# Altium PCB PCB_BTL.PcbDoc
Units mil, origin at the board's own origin, x right, y up, seen from the top; angles counter-clockwise.
Board outline 6000 x 4000 mil, 2 copper layers (Top Layer, Bottom Layer); 34 components, 25 nets, 123 pads, 0 vias.
Unrouted connection lines stored in the file: 63.
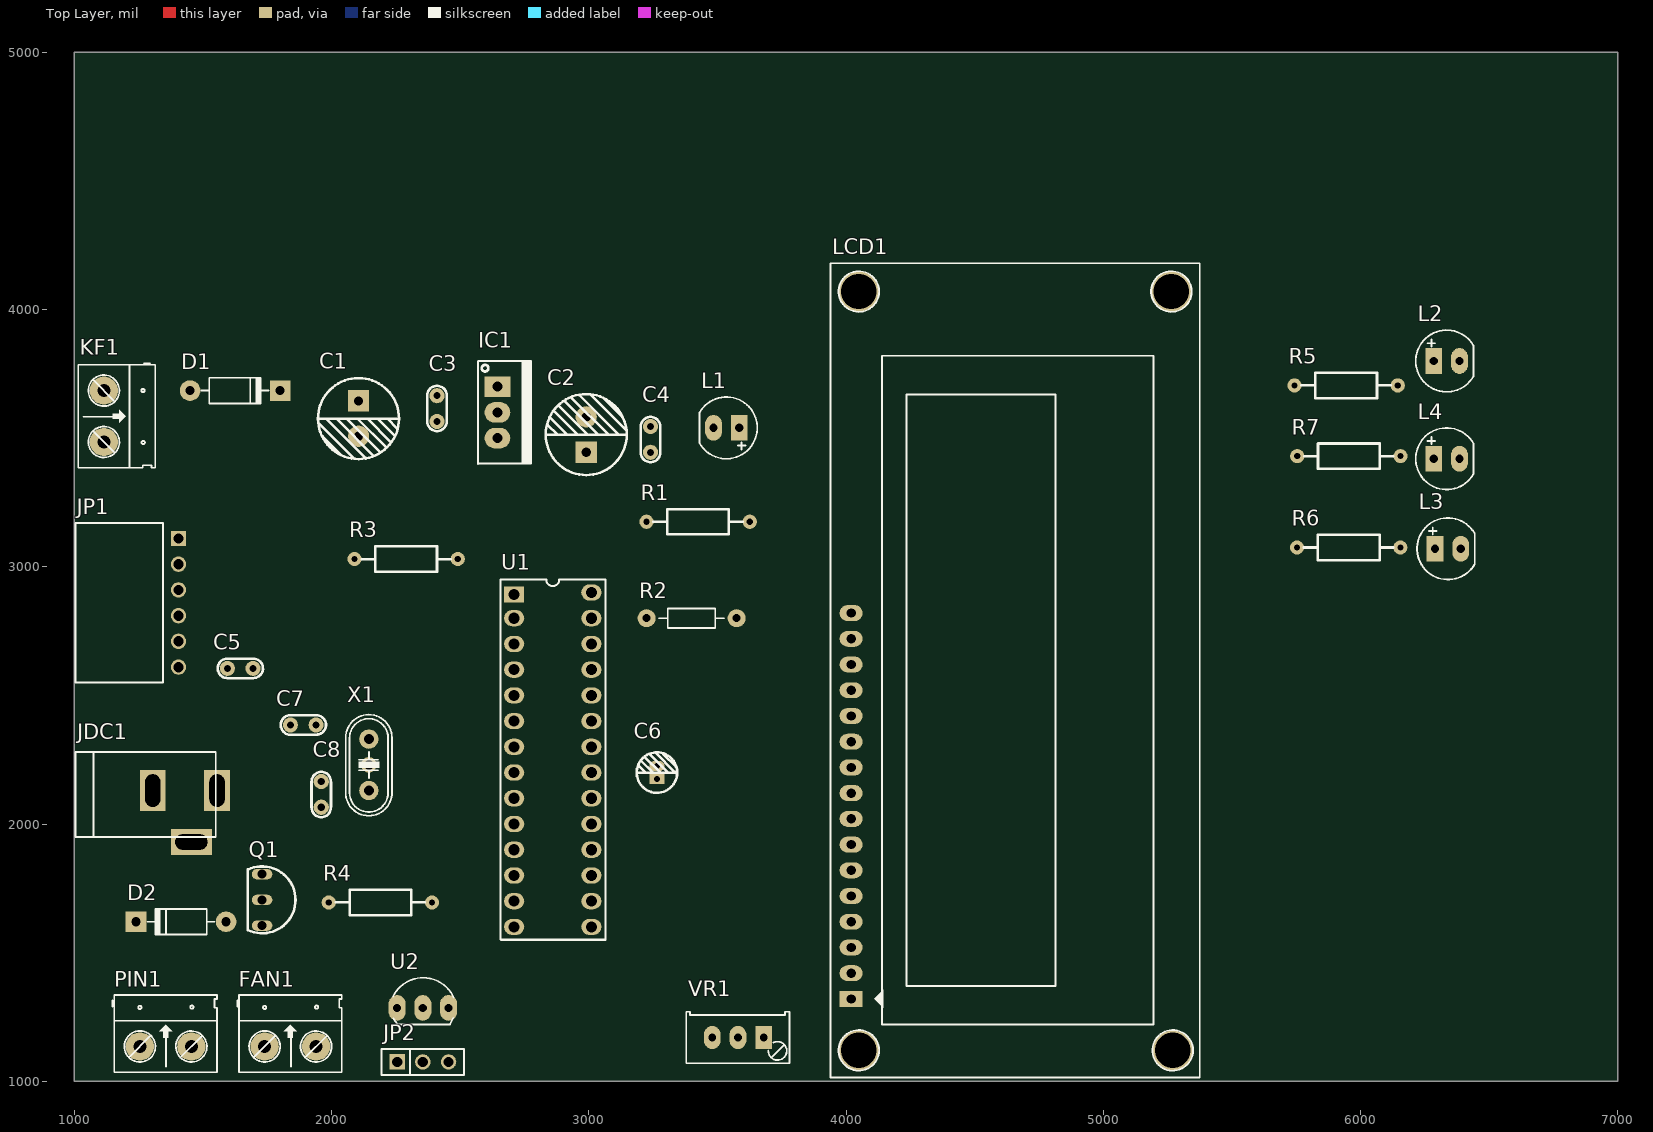
[diagram p0: Top Layer view]
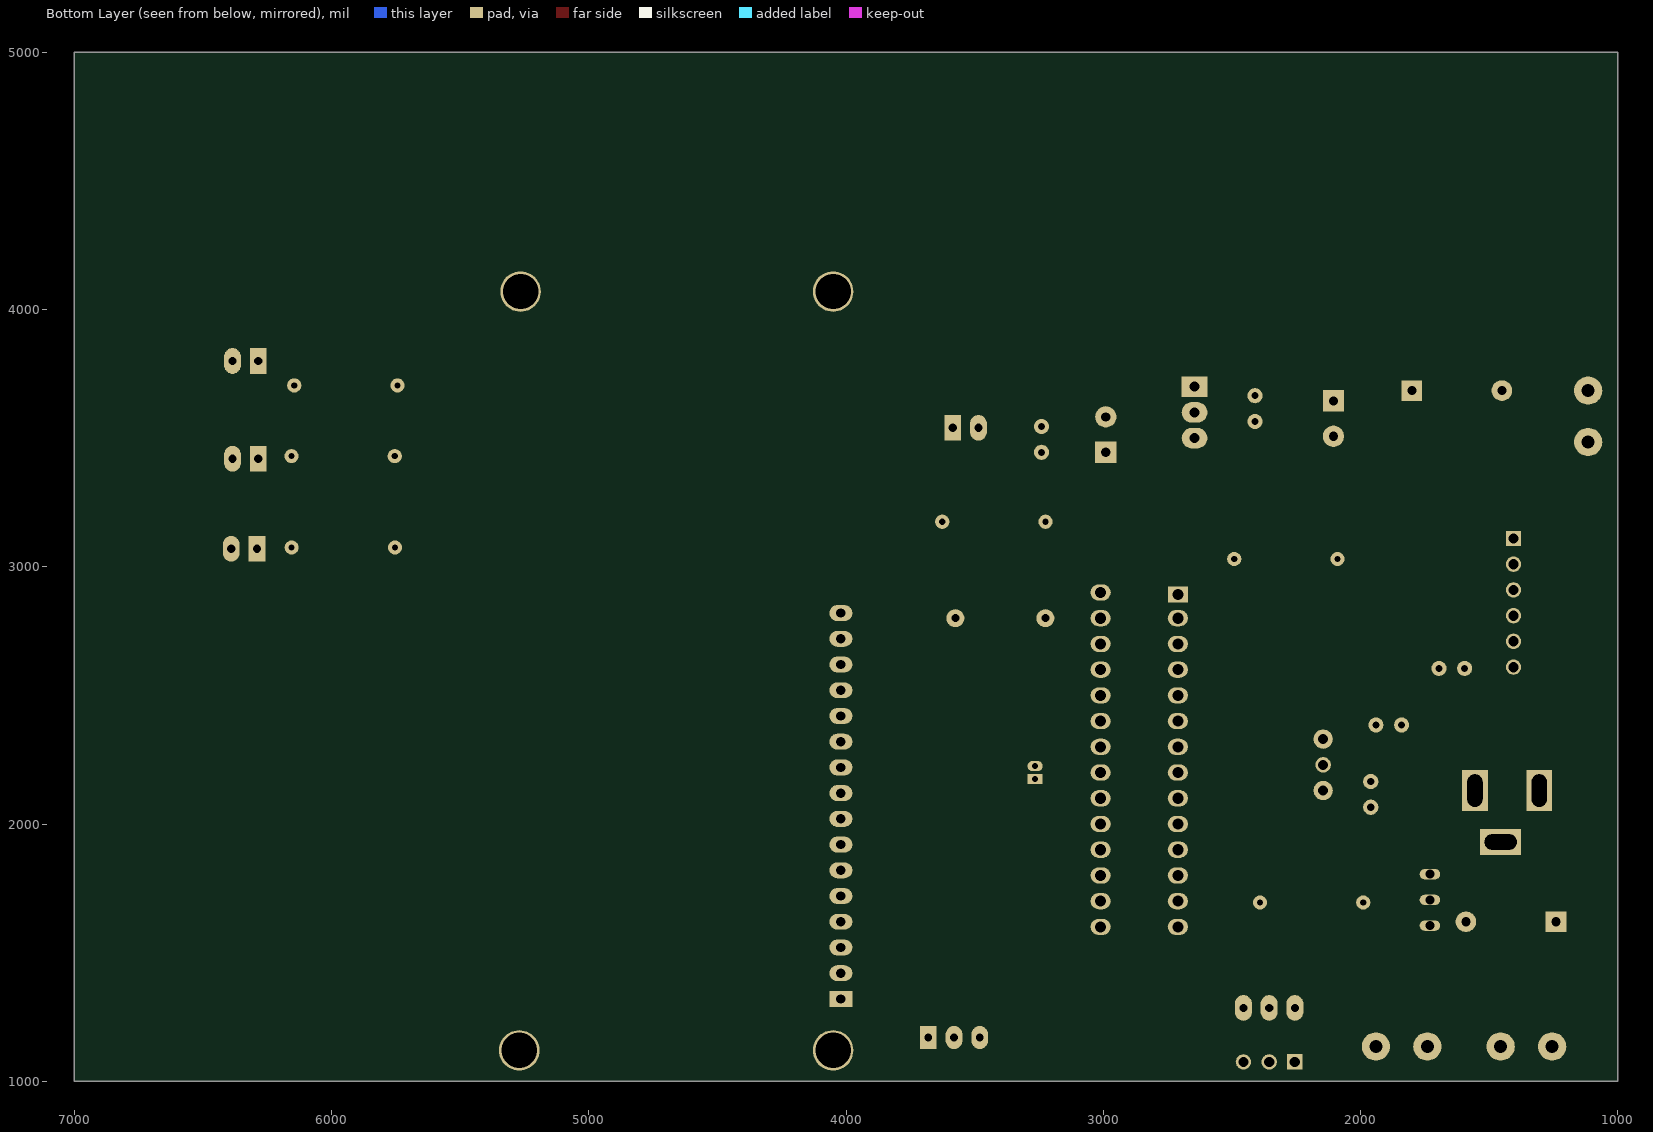
[diagram p1: Bottom Layer view, seen from below]

## Layer stack, top to bottom
Top Solder: solder mask 0.4, Solder Resist, Dk 3.5
Top Layer: signal copper 1.4
Dielectric 1: dielectric 12.6, FR-4, Dk 4.8
Bottom Layer: signal copper 1.4
Bottom Solder: solder mask 0.4, Solder Resist, Dk 3.5

## Board outline
1000,1000 7000,1000 7000,5000 1000,5000

## Design rules (kind name [scope] priority, off if disabled: settings)
Clearance [All] p1: gap=10 ignorepadtopadclearanceinfootprint=FALSE
PolygonConnect [All] p1: connectstyle=Relief reliefconductorwidth=10 reliefentries=4 polygonreliefangle="90 Angle" airgapwidth=10
RoutingVias [All] p1: holewidth=28 width=50 viastyle="Through Hole" minholewidth=28 minwidth=50 maxholewidth=28 maxwidth=50
SolderMaskExpansion [All] p1: expansion=4 istentingtop=FALSE
SupplyNets "Schematic Supply Nets_1" [InNet('\')] p1: voltage=0.000
Width [All] p1: maxlimit=10 minlimit=10 preferedwidth=10
30 further rules are at their usual default settings.

## Components (designator, comment, footprint, x,y, rotation, side; value= is the part's Value field where it differs from the comment)
C1 "1000uF" "tu hoa 8mm" 2105,3576.1 r270 top
C2 "1000uF" "tu hoa 8mm" 2990,3513.9 r90 top
C3 "104" "tu gom" 2410,3615 r270 top
C4 "104" "tu gom" 3240,3495 r90 top
C5 "104" "tu gom" 1645,2605 r180 top
C6 "10uF" "tu hoa 4mm" 3265,2200 r90 top
C7 "22pF" "tu gom" 1890,2385 r180 top
C8 "22pF" "tu gom" 1960,2115 r90 top
D1 "1N4007" D1A 1450,3685 r180 top
D2 "1N4007" D1A 1590,1620 r0 top
FAN1 "DC MOTOR" "Con 2 KF301 5.08" 1740,1135 r0 top
IC1 "LM7805" QTO-220 2645,3700 r270 top
JDC1 "Jac DC" DC-IN 1430,2030 r0 top
JP1 "JP 1x6 2.54" "JP 1x6 CC" 1405,2860 r270 top
JP2 "JP Sensor" "JP 1x3 CT" 2255,1075 r0 top
KF1 "CON 2 KF301" "Con 2 KF301 5.08" 1115,3685 r270 top
L1 "LED 5mm" LED-5MM-RED 3585,3540 r180 top
L2 "LED 5mm" LED-5MM-RED 6285,3800 r0 top
L3 "LED 5mm" LED-5MM-RED 6290,3070 r0 top
L4 "LED 5mm" LED-5MM-RED 6285,3420 r0 top
LCD1 "LCD16x2A" LCD16X2 4020,1320 r90 top
PIN1 "9V DC" "Con 2 KF301 5.08" 1255,1135 r0 top
Q1 "?" TO92 1730,1705 r180 top value=C9014
R1 "1k" "tro vach 1/4w" 3425,3175 r180 top
R2 "1k" R1/4W 3575,2800 r180 top value="R1/4W - 1K"
R3 "10k" "tro vach 1/4w" 2290,3030 r0 top
R4 "1k" "tro vach 1/4w" 2190,1695 r180 top
R5 "1k" "tro vach 1/4w" 5944.21,3705 r180 top
R6 "1k" "tro vach 1/4w" 5954.21,3075 r180 top
R7 "1k" "tro vach 1/4w" 5955,3430 r180 top
U1 "ATMEGA328P-PU" 27_DIP_7.62mm 2709.61,2892.52 r0 top
U2 "LM35" QTO-92 2355,1285 r0 top
VR1 "10K" VR1 3680,1170 r180 top value="VR 10K"
X1 "16Mhz" XT2 2145,2230 r90 top value=4Mhz

## Footprints (in the part's own frame and the unit in brackets; to place one, negate y for a bottom-side part, rotate by r counter-clockwise, add the part's x,y. Pads: shape width x height; smd on the part's side, far side on the other; paste and mask are expansions set on the pad)
27_DIP_7.62mm [mm]
  rect 2x1.6 hole 1.1: 1(0,0)
  oval 2x1.6 hole 1.1: 2(0.01,-2.35) 3(0.01,-4.89) 4(0.01,-7.43) 5(0.01,-9.97) 6(0.01,-12.51) 7(0.01,-15.05) 8(0.01,-17.59) 9(0.01,-20.13) 10(0.01,-22.67) 11(0.01,-25.21) 12(0.01,-27.75) 13(0.01,-30.29) 14(0.01,-32.83) 15(7.63,-32.83) 16(7.63,-30.29) 17(7.63,-27.75) 18(7.63,-25.21) 19(7.63,-22.67) 20(7.63,-20.13) 21(7.63,-17.59) 22(7.63,-15.05) 23(7.63,-12.51) 24(7.63,-9.97) 25(7.63,-7.43) 26(7.63,-4.89) 27(7.63,-2.35) 28(7.63,0.19)
  silkscreen extent -1.35,-34.1 9.02,1.46, body extent -0.23,-34.26 7.65,1.68, height 4.65
"Con 2 KF301 5.08" [mil]
  round 110 hole 50: 1(0,0) 2(200,0)
  silkscreen extent -106,-100 300,200, body extent -45,-97 255,190, height 335
D1A [mil] "Diode 1A, W 100mil, L 350mil"
  round 80 hole 35: 1(0,0)
  rect 80x80 hole 35: 2(-350,0)
  silkscreen extent -305,-50 -45,50, body extent -386,-33 34,36, height 84
DC-IN [mil] "Jac DC input"
  rect 100x160 hole 59.06 slot 125.98 at 90 deg: 1(125,100) 2(-125,100)
  rect 160x100 hole 59.06 slot 125.98 at 0 deg: 3(25,-100)
  silkscreen extent -425,-80 120,250, body extent -410,-105 134,269, height 434
"JP 1x3 CT" [mm]
  rect 1.52x1.52 hole 1.02: 1(0,0)
  round 1.52 hole 1.02: 2(2.54,0) 3(5.08,0)
  silkscreen extent -1.52,-1.27 6.6,1.27, body extent -1.52,-1.25 6.6,1.25, height 8.51
"JP 1x6 CC" [mm] "06p 1 row Right angle"
  rect 1.52x1.52 hole 1.02: 1(-6.35,0)
  round 1.52 hole 1.02: 2(-3.81,0) 3(-1.27,0) 4(1.27,0) 5(3.81,0) 6(6.35,0)
  silkscreen extent -7.87,-10.17 7.87,-1.52, body extent -7.87,-10.09 7.87,0.21, height 2.51
LCD16X2 [mil] "LCD dipslay 16x2, 16 pin"
  rect 62x90 hole 36: 1(0,0)
  oval 62x90 hole 36: 2(100,0) 3(200,0) 4(300,0) 5(400,0) 6(500,0) 7(600,0) 8(700,0) 9(800,0) 10(900,0) 11(1000,0) 12(1100,0) 13(1200,0) 14(1300,0) 15(1400,0) 16(1500,0)
  round 157.48 hole 137.8: "Hole 0"(-200,-30) "Hole 0"(-200,-1250) "Hole 0"(2750,-1245) "Hole 0"(2750,-30)
  silkscreen extent -305,-1355 2860,80, body extent -309,-1355 2860,82, height 414
LED-5MM-RED [mil] "LED 2 PIN, 5 ly , Only colour,pin to pin 100mil"
  rect 65x100 hole 32: 1(0,0)
  oval 65x100 hole 32: 2(100,0)
  silkscreen extent -70,-120 154,120, body extent -65,-119 149,118, height 339
QTO-92 [mil] "TO-92"
  oval 66x100 hole 32: 1(-100,0) 2(0,0) 3(100,0)
  silkscreen extent -117,-65 120,118, body extent -109,-66 109,95, height 245
QTO-220 [mil] "TO-220 - 1-2-3"
  rect 80x100 hole 39: 1(0,0)
  oval 80x100 hole 39: 2(100,0) 3(200,0)
  silkscreen extent -100,-76 300,130, body extent -121,-85 321,100, height 755
R1/4W [mil] "R 1/4W, 2 Pin, 350mil"
  round 70 hole 31: 1(0,0) 2(350,0)
  silkscreen extent 48,-38 302,38, body extent -40,-47 386,47, height 111
TO92 [mil] "TO, Flat Index; 3 In-Line, Axial Leads; Body Dia. 4.8mm"
  oval 80x40 hole 35.43: 1(0,-100) 2(0,0) 3(0,100)
  silkscreen extent -130,-130 55,130, body extent -100,-109 61,109, height 343
"tro vach 1/4w" [mm]
  round 1.4 hole 0.6: 1(-5.1,0) 2(5.1,0)
  silkscreen extent -4.39,-1.25 4.42,1.25, body extent -5.38,-1.2 5.38,1.2, height 2.41
"tu gom" [mm] "Tu gom mini"
  round 1.5 hole 0.7: 1(-1.27,0) 2(1.27,0)
  silkscreen extent -2.25,-0.97 2.22,0.97, body extent -2.92,-0.85 2.92,0.85, height 6.12
"tu hoa 4mm" [mm]
  rect 1x1.5 hole 0.6: 1(-0.635,0)
  oval 1x1.5 hole 0.6: 2(0.635,0)
  silkscreen extent -2,-2 2.01,2.01, body extent -2.47,-2.47 2.58,2.58, height 14.81
"tu hoa 8mm" [mm]
  rect 2.1x2.1 hole 0.9: 1(-1.75,0)
  round 2.1 hole 0.9: 2(1.75,0)
  silkscreen extent -4,-4 4,4, body extent -4.1,-4.07 4.1,4.13, height 13.81
VR1 [mil] "Variable Resistor"
  rect 65x90 hole 30: 1(0,0)
  oval 65x90 hole 30: 2(100,0) 3(200,0)
  silkscreen extent -100,-100 301,100, body extent -88,-130 288,110, height 455
XT2 [mm] "Footpin for Crystal 2 pin"
  round 1.524 hole 1: 0(0,0)
  round 1.905 hole 1: 1(-2.54,0) 2(2.54,0)
  silkscreen extent -5.03,-2.29 4.96,2.29, body extent -5.93,-2.36 5.42,2.29, height 3.5

## Part data
C1 C2: library part "Tu Hoa 1000uF 16V 8x20", "Cắm", Chung_Loai=Cắm, Don_Vi=Con, Ma_Hang=MH008300, So_Chan=2, Ten_Linh_Kien="Tụ Hóa 1000uF 16V 8x20MM"
C3 C4 C5: library part "Tu gom 104 50V", "Cắm", Chung_Loai=Cắm, Don_Vi=Con, Ma_Hang=MH004761, So_Chan=2, Ten_Linh_Kien="Tụ gốm 104 100nF 50V"
C6: library part "Tu Hoa 10uF 16V 4x7", "Cắm", Chung_Loai=Cắm, Don_Vi=Con, Ma_Hang=MH006855, So_Chan=2, Ten_Linh_Kien="Tụ Hóa 10uF 16V"
C7 C8: library part "Tu gom 22pF 50V", "Cắm", Chung_Loai=Cắm, Don_Vi=Con, Ma_Hang=MH004771, So_Chan=2, Ten_Linh_Kien="Tụ gốm 22P 50V"
D1 D2: library part D1A, "Diode 1A"
FAN1 PIN1: library part "CON 2 KF301", "Cắm", Chung_Loai=Cắm, Don_Vi=Con, Ma_Hang=MH000987, Ten_Linh_Kien="CON 2 KF301-2P 5.08MM Xanh Dương"
IC1: library part LM78xx, "On ap +, from + 5 to + 24VDC"
JDC1: library part DCIN, "Jac DC input"
JP1: library part "JP 1x6 2.54 Cai Cong", "Cắm", Chung_Loai=Cắm, Don_Vi=Con, Ma_Hang=MH001265, Ten_Linh_Kien="Jump Đơn Cái 2.54MM 1x40P Cong"
JP2: library part "JP 1x3 2.54 Cai Thang", "Cắm", Chung_Loai=Cắm, Don_Vi=Con, Ma_Hang=MH004006, Ten_Linh_Kien="Jump Đơn Cái 2.54MM 1x20P Thẳng"
KF1: "Cắm", Chung_Loai=Cắm, Don_Vi=Con, Ma_Hang=MH000987, Ten_Linh_Kien="CON 2 KF301-2P 5.08MM Xanh Dương"
L1 L2 L3 L4: library part "LED 5mm Do", "Cắm", Chung_Loai=Cắm, Don_Vi=Con, Ma_Hang=MH008967, Ten_Linh_Kien="Led 5MM Phủ Đỏ (1000c)"
LCD1: library part LCD16x2, "LCD dipslay 16 char, 2 line"
Q1: library part "Trans 2N3904", "NPN transistor EBC"
R1 R4 R5 R6 R7: library part "Tro Vach 1/4W 5% 1k", "Cắm", Chung_Loai=Cắm, Don_Vi=Con, Ma_Hang=MH007390, So_Chan=2, Ten_Linh_Kien="Trở Vạch 1/4w 5% 1k"
R2: library part Res, "Resistor 1/4W"
R3: library part "Tro Vach 1/4W 5% 10k", "Căm", Chung_Loai=Cắm, Don_Vi=Con, Ma_Hang=MH007354, So_Chan=2, Ten_Linh_Kien="Trở Vạch 1/4w 5% 10K"
U1: "ATMEGA328P-PU; 8 bit Microcontroller AVR 20MHz 1; 32kb Flash; 2kb RAM; I2C SPI 2", Case/Package=PDIP, Frequency=20MHz, Manufacturer="Microchip / Atmel", Max Operating Temperature=85°C, Max Supply Voltage=5.5V, Min Operating Temperature=-40°C, Min Supply Voltage=1.8V, Package Quantity=14, Supplier Part Number 1=ATMEGA328P-PU-ND, Category=Microcontrollers, ComponentLink1Description=https://datasheet.ciiva.com/20168/73-4283-20168380.pdf?src-supplier=Rapid+Electronics, ComponentLink1URL=https://datasheet.ciiva.com/20168/73-4283-20168380.pdf?src-supplier=Rapid+Electronics, ComponentLink2Description=https://datasheet.ciiva.com/19457/2139111-19457070.pdf?src-supplier=Jameco, ComponentLink2URL=https://datasheet.ciiva.com/19457/2139111-19457070.pdf?src-supplier=Jameco, ComponentLink3Description=https://datasheet.ciiva.com/1157/1684409-1157696.pdf?src-supplier=Element14, ComponentLink3URL=https://datasheet.ciiva.com/1157/1684409-1157696.pdf?src-supplier=Element14, ComponentLink4Description=https://datasheet.ciiva.com/26818/atmega328p-pu-26818578.pdf?src-supplier=IIIC, ComponentLink4URL=https://datasheet.ciiva.com/26818/atmega328p-pu-26818578.pdf?src-supplier=IIIC, ComponentLink5Description=https://datasheet.ciiva.com/29119/155197-da-01-en-microcontr-atmega328p-pu-8bit-pdip-28-29119593.pdf?src-supplier=Conrad, ComponentLink5URL=https://datasheet.ciiva.com/29119/155197-da-01-en-microcontr-atmega328p-pu-8bit-pdip-28-29119593.pdf?src-supplier=Conrad, ComponentLink6Description=https://datasheet.ciiva.com/15213/getdatasheetpartid-318533-15213133.pdf?src-supplier=Verical, ComponentLink6URL=https://datasheet.ciiva.com/15213/getdatasheetpartid-318533-15213133.pdf?src-supplier=Verical, Contact Plating=Tin,Matte, Core Architecture=AVR, Data Bus Width=8b, Height=3.28mm, Interface=I2C,SPI,UART,USART,2-Wire, Lead Free="Lead Free", Length=37.4mm, Manufacturer Part Number=ATMEGA328P-PU, Max Frequency=20MHz, Memory Size=32KB, Memory Type=FLASH, Mount="Through Hole", Number of ADC Channels=6, Number of I2C Channels=1, Number of I/Os=23, Number of Pins=28, Number of Programmable I/O=23, Number of PWM Channels=6, Number of SPI Channels=1, Number of Timers/Counters=3, Oscillator Type=Internal, Packaging=Rail/Tube, Peripherals="Brown-out Detect/Reset,POR,PWM,WDT", Pricing 1="1=2,08000, 25=1,91000, 100=1,73000 (USD)", Radiation Hardening=No, RAM Size=2KB, REACH SVHC="No SVHC", RoHS=Yes, Stock 1=5280, Supplier 1=Digi-Key, Watchdog Timer=Yes, Width=6.76mm
U2: "Teminal"
VR1: library part VR1, "Var Resistor"
X1: library part XT2, "Crystal For all Crystal 2pin."

## Nets (pads, with @x,y where several pads share a name; then routed paths per layer and width w, separated by ;. In a path a pad name is that pad's centre, name@x,y a point inside that pad or via, vN(x,y) a via of type N, cw(c..) or ccw(c..) an arc to the next point about the centre after c; other vN are vias at no path point)
9: C7.1 U1.9 X1.2
9V: D2.2 FAN1.2 PIN1.1
10: C8.1 U1.10 X1.1
20: C2.1 C4.1 C6.1 IC1.3 JP1.3 JP2.1 LCD1.2 R1.2 R2.2 R3.1 U1.7 U1.20 U2.1 VR1.1
\: C1.2 C2.2 C3.2 C4.2 C6.2 C7.2 C8.2 IC1.2 JDC1.2 JP1.1 JP2.3 KF1.2 L1.2 L2.2 L3.2 L4.2 LCD1.1 LCD1.5 LCD1.16 PIN1.2 Q1.1 U1.8 U1.22 U2.3 VR1.3
A0: JP2.2 U2.2
CTS: JP1.2
DTR: C5.1 JP1.6
fan: R4.1
NetC1_1: C1.1 C3.1 D1.2 IC1.1
NetC5_2: C5.2 R3.2 U1.1
NetD1_1: D1.1 JDC1.1 KF1.1
NetD2_1: D2.1 FAN1.1 Q1.3
NetL1_1: L1.1 R1.1
NetL2_1: L2.1 R5.1
NetL3_1: L3.1 R6.1
NetL4_1: L4.1 R7.1
NetLabel69: R6.2
NetLabel70: R7.2
NetLCD1_3: LCD1.3 VR1.2
NetLCD1_15: LCD1.15 R2.1
NetQ1_2: Q1.2 R4.2
RX: JP1.5 U1.3
SCK: R5.2
TX: JP1.4 U1.2
pads on no net: "LCD1.Hole 0" JDC1.3 LCD1.4 LCD1.6 LCD1.7 LCD1.8 LCD1.9 LCD1.10 LCD1.11 LCD1.12 LCD1.13 LCD1.14 U1.4 U1.5 U1.6 U1.11 U1.12 U1.13 U1.14 U1.15 U1.16 U1.17 U1.18 U1.19 U1.21 U1.23 U1.24 U1.25 U1.26 U1.27 U1.28 X1.0